# Altium PCB PCB.PcbDoc
Units mm, origin at the board's own origin, x right, y up, seen from the top; angles counter-clockwise.
Board outline 97 x 146.5 mm, 4 copper layers (Top Layer, Int1 (PWR), Int2 (GND), Bottom Layer), stack 1.586 mm thick; 101 components, 61 nets, 382 pads, 119 vias.
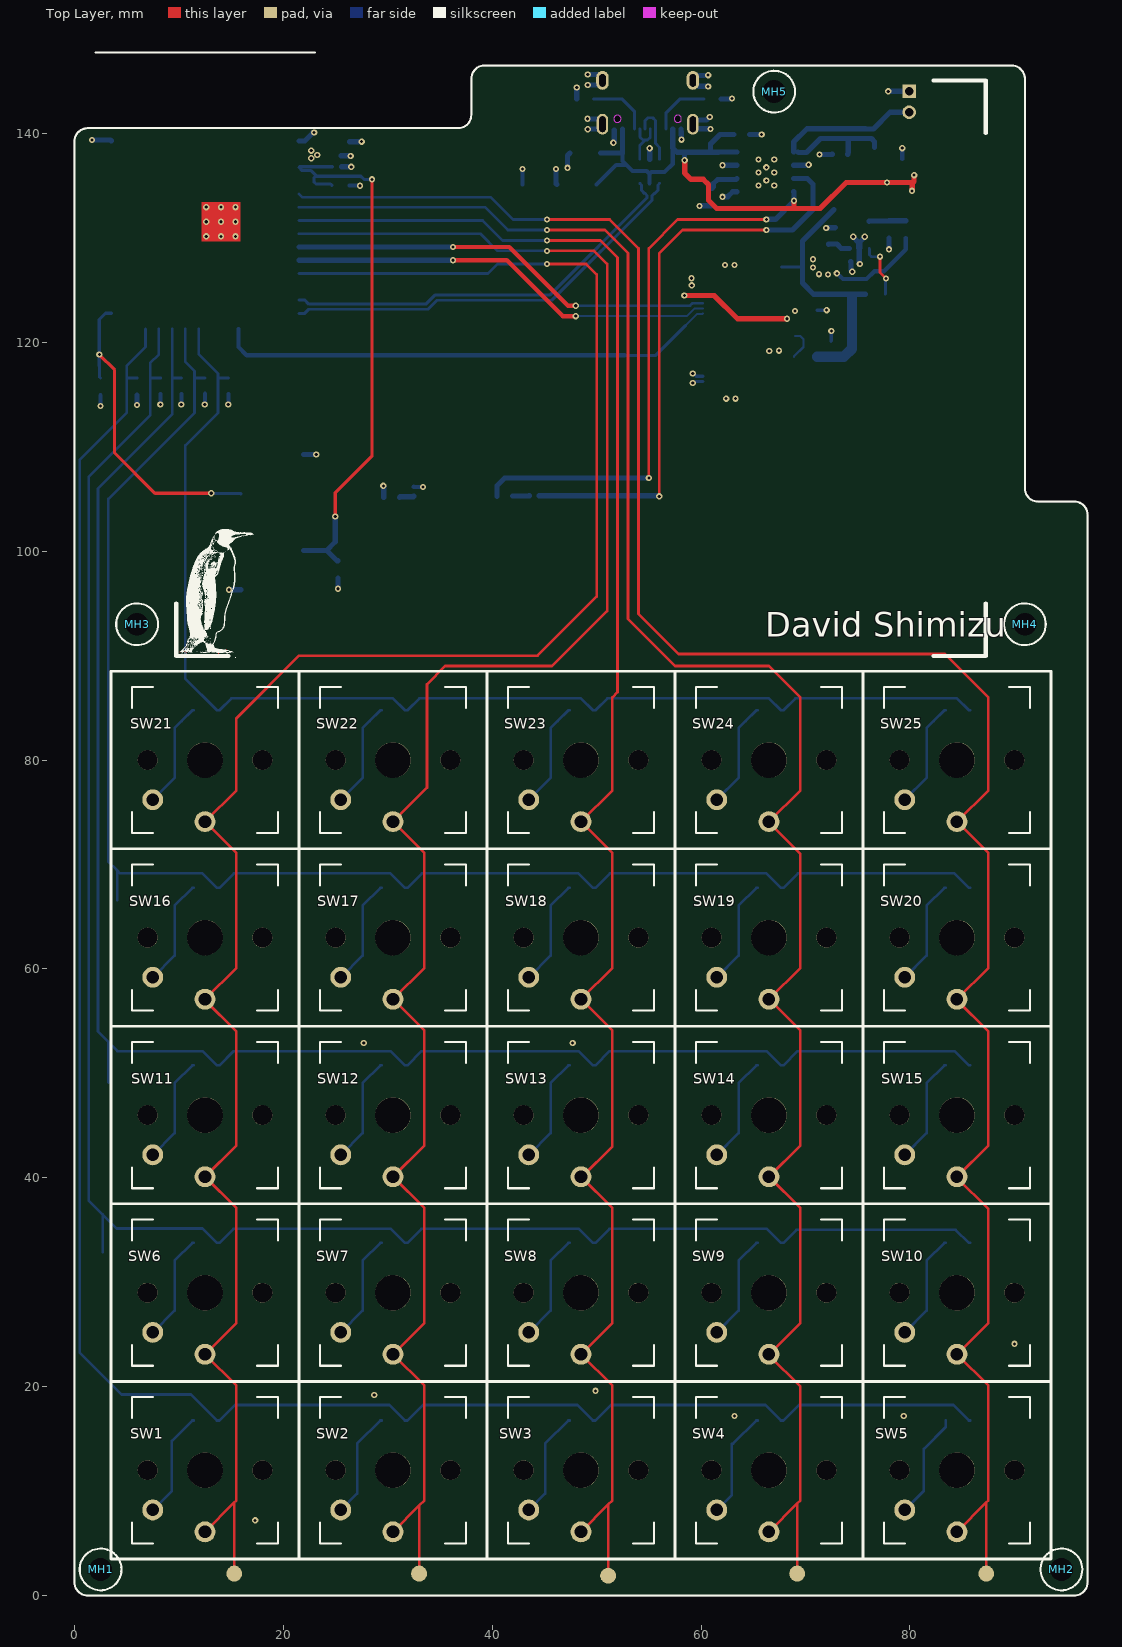
[diagram p0: Top Layer view]
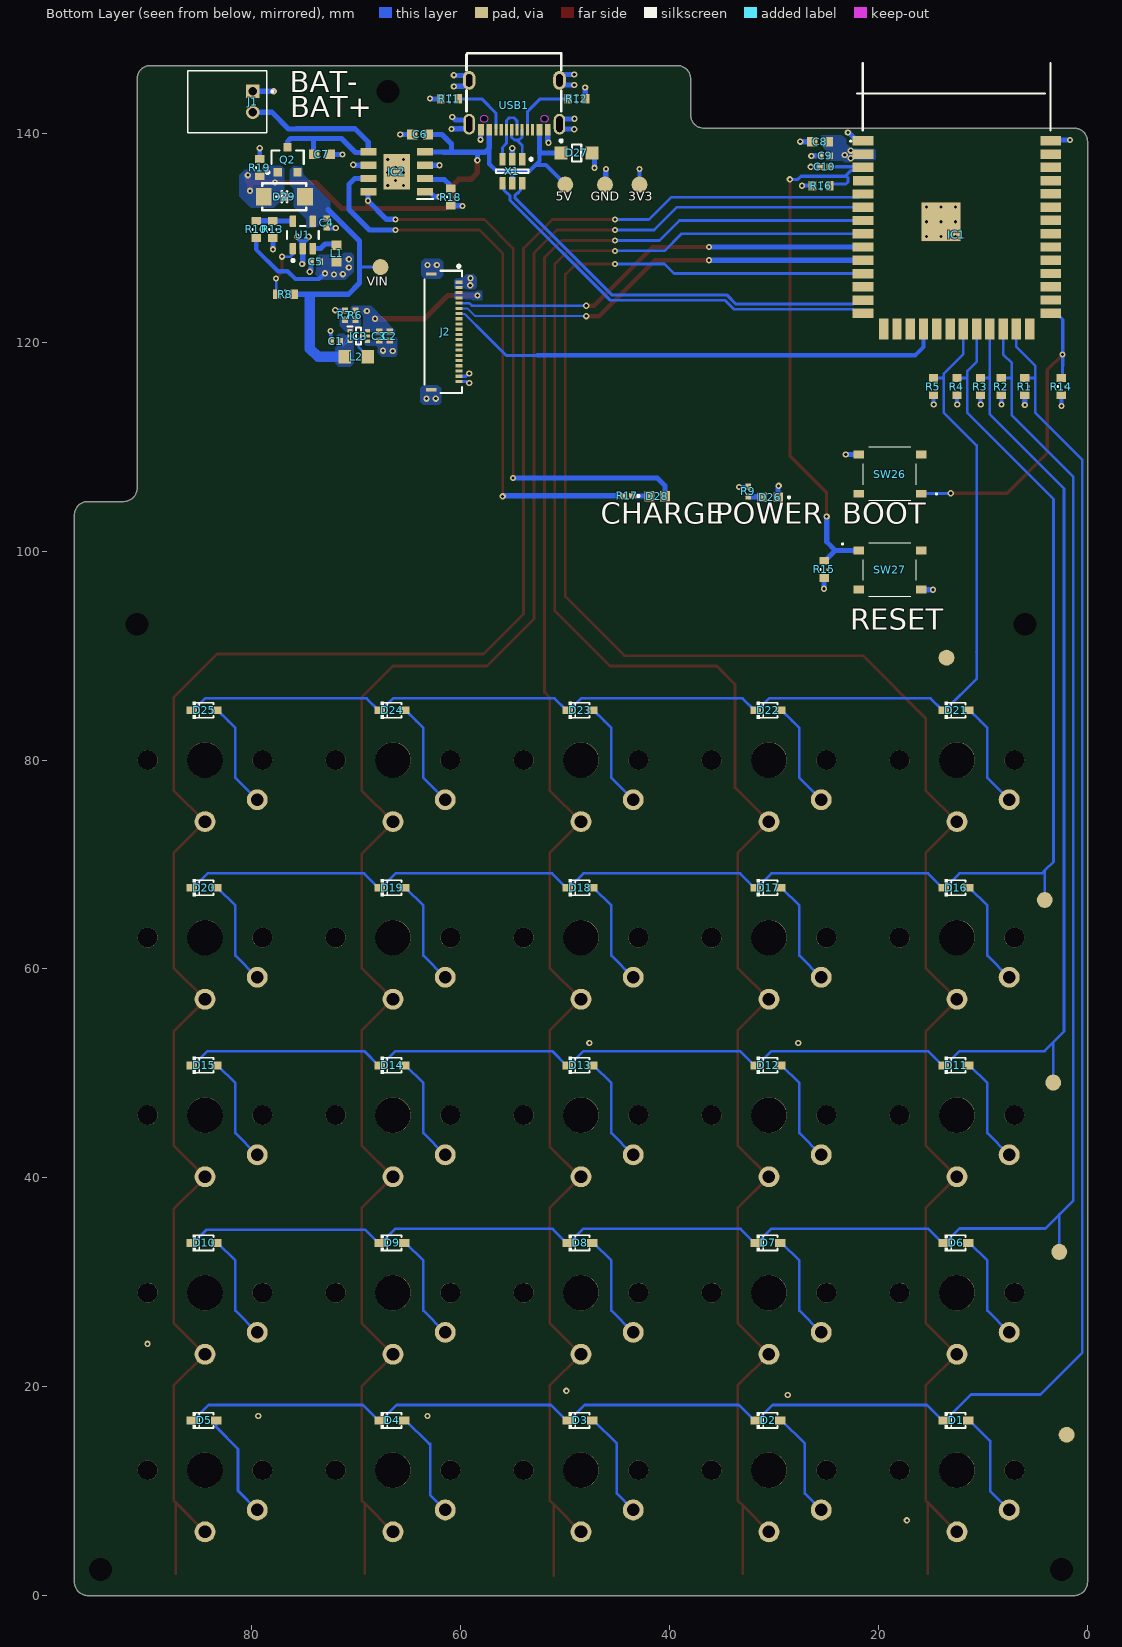
[diagram p1: Bottom Layer view, seen from below]
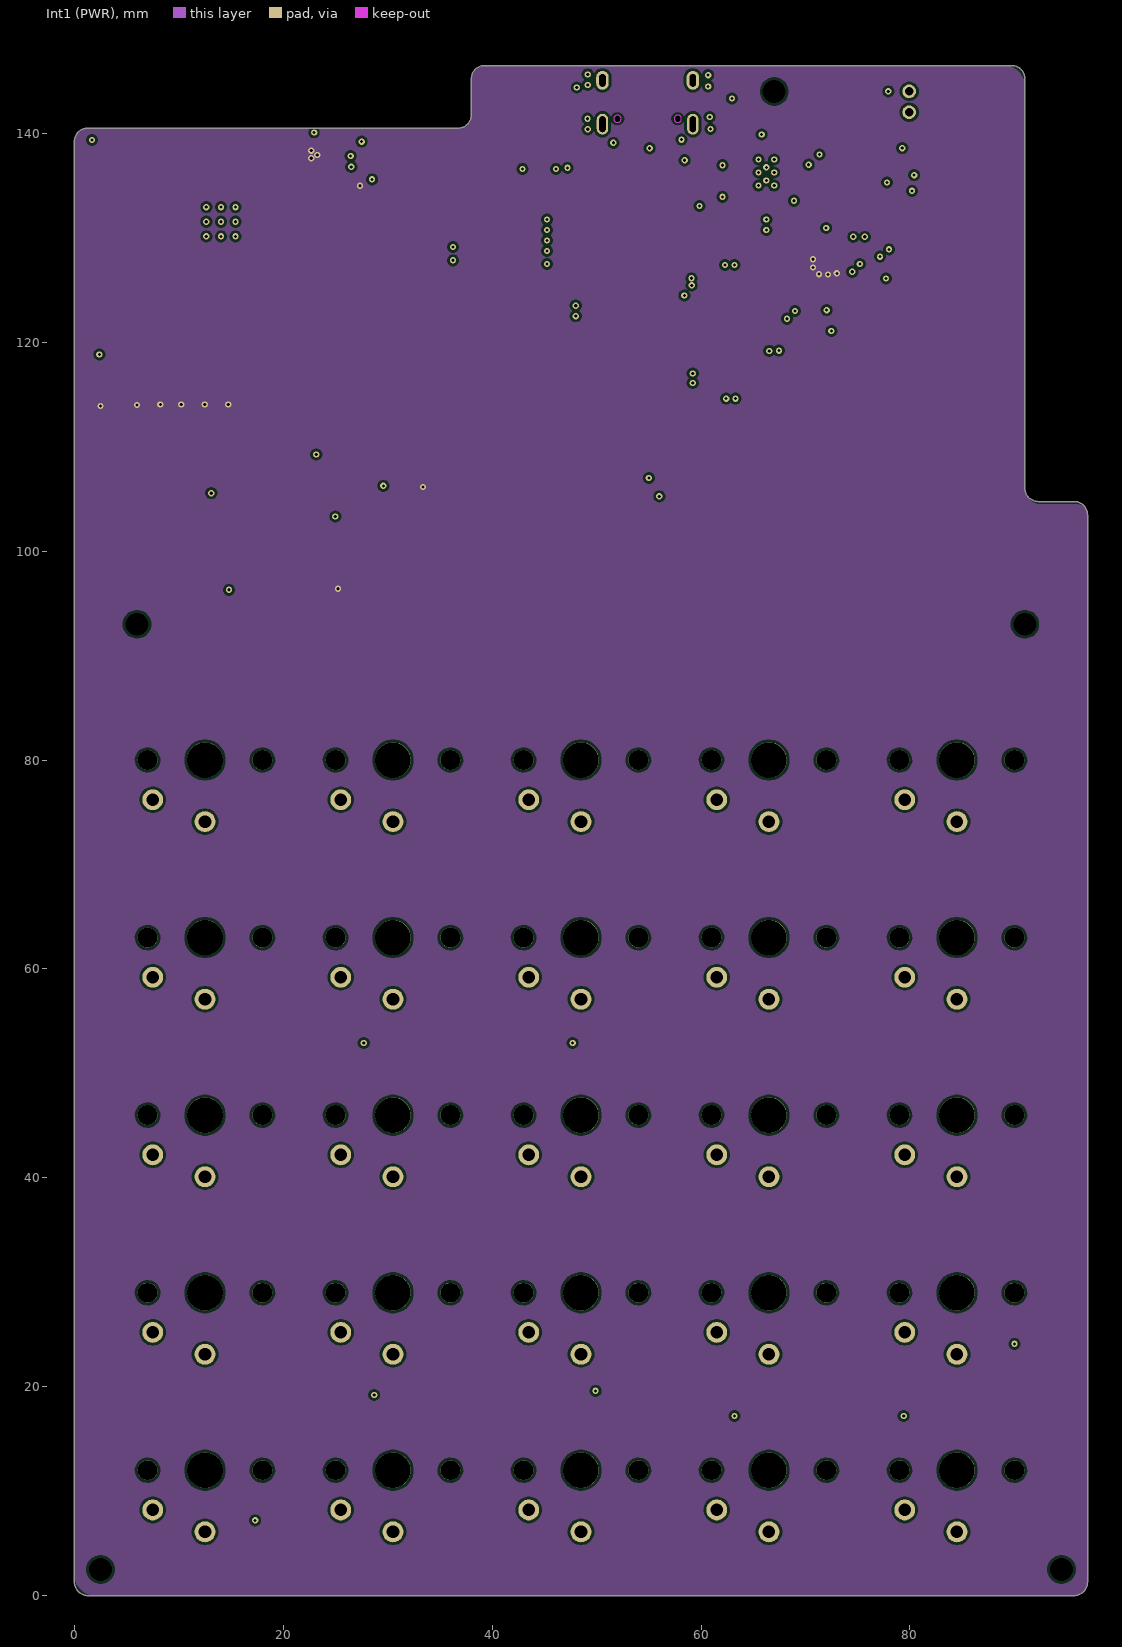
[diagram p2: Int1 (PWR)]
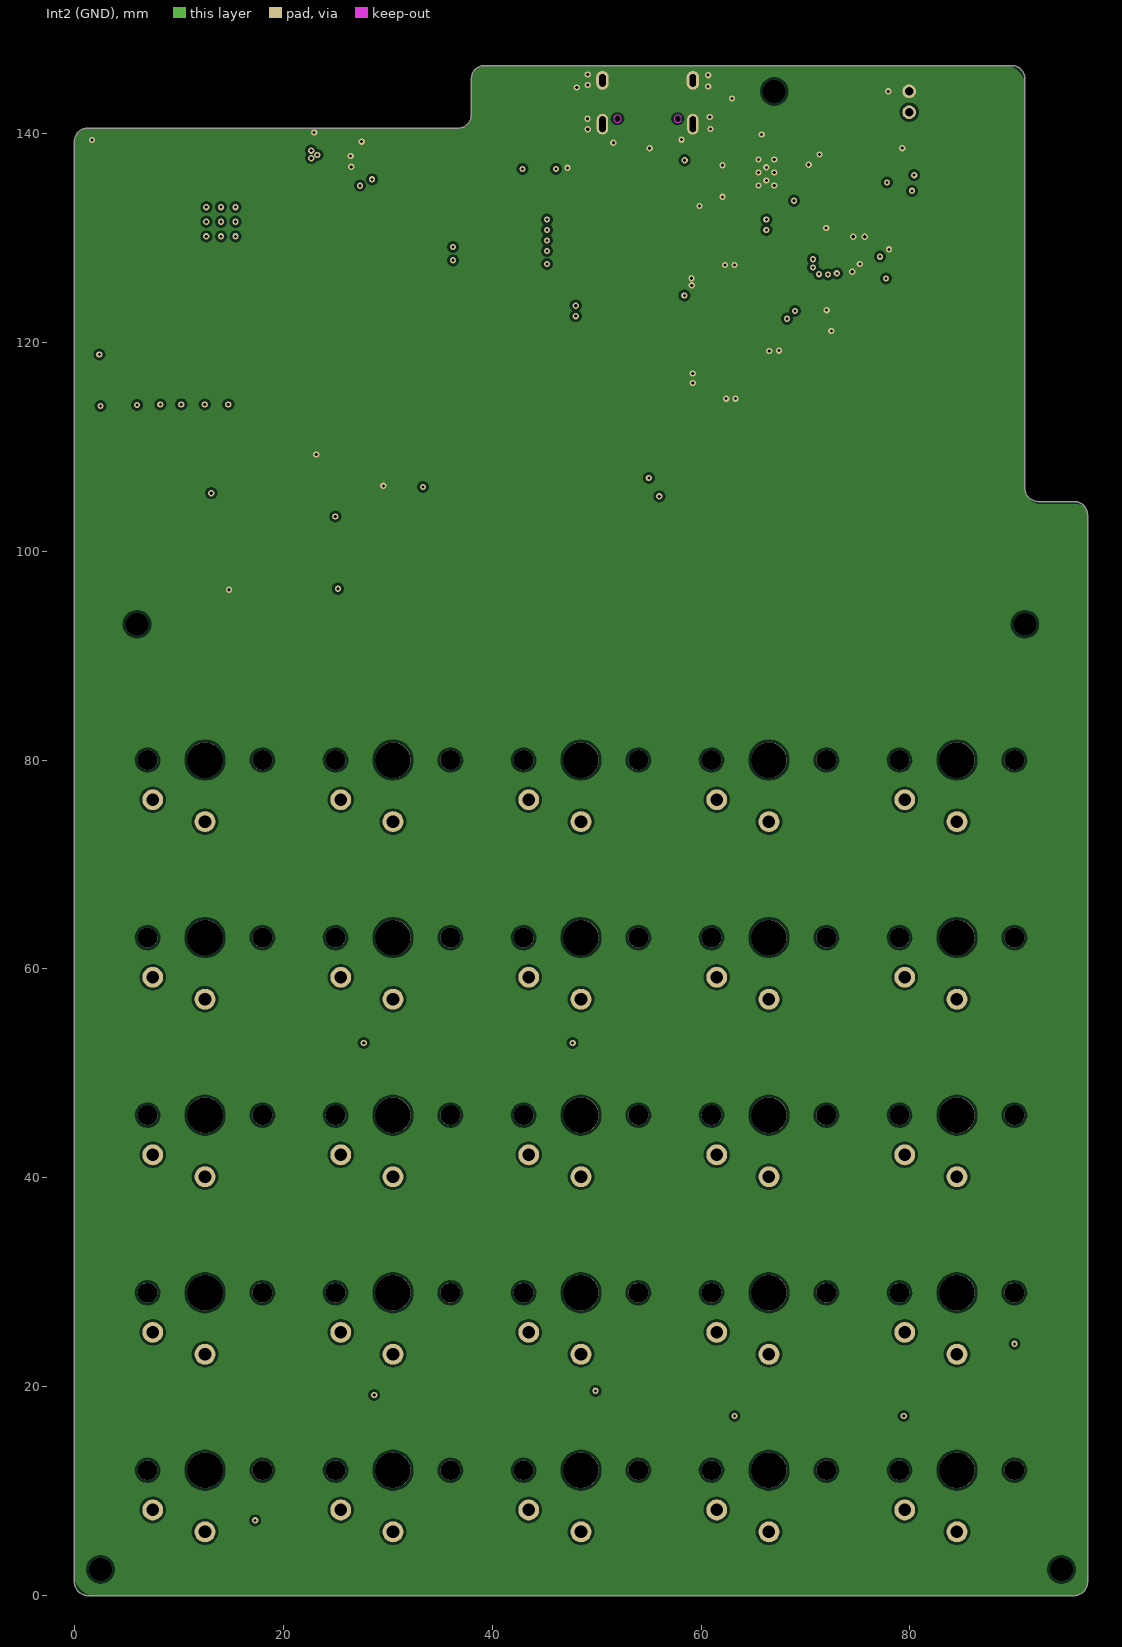
[diagram p3: Int2 (GND)]
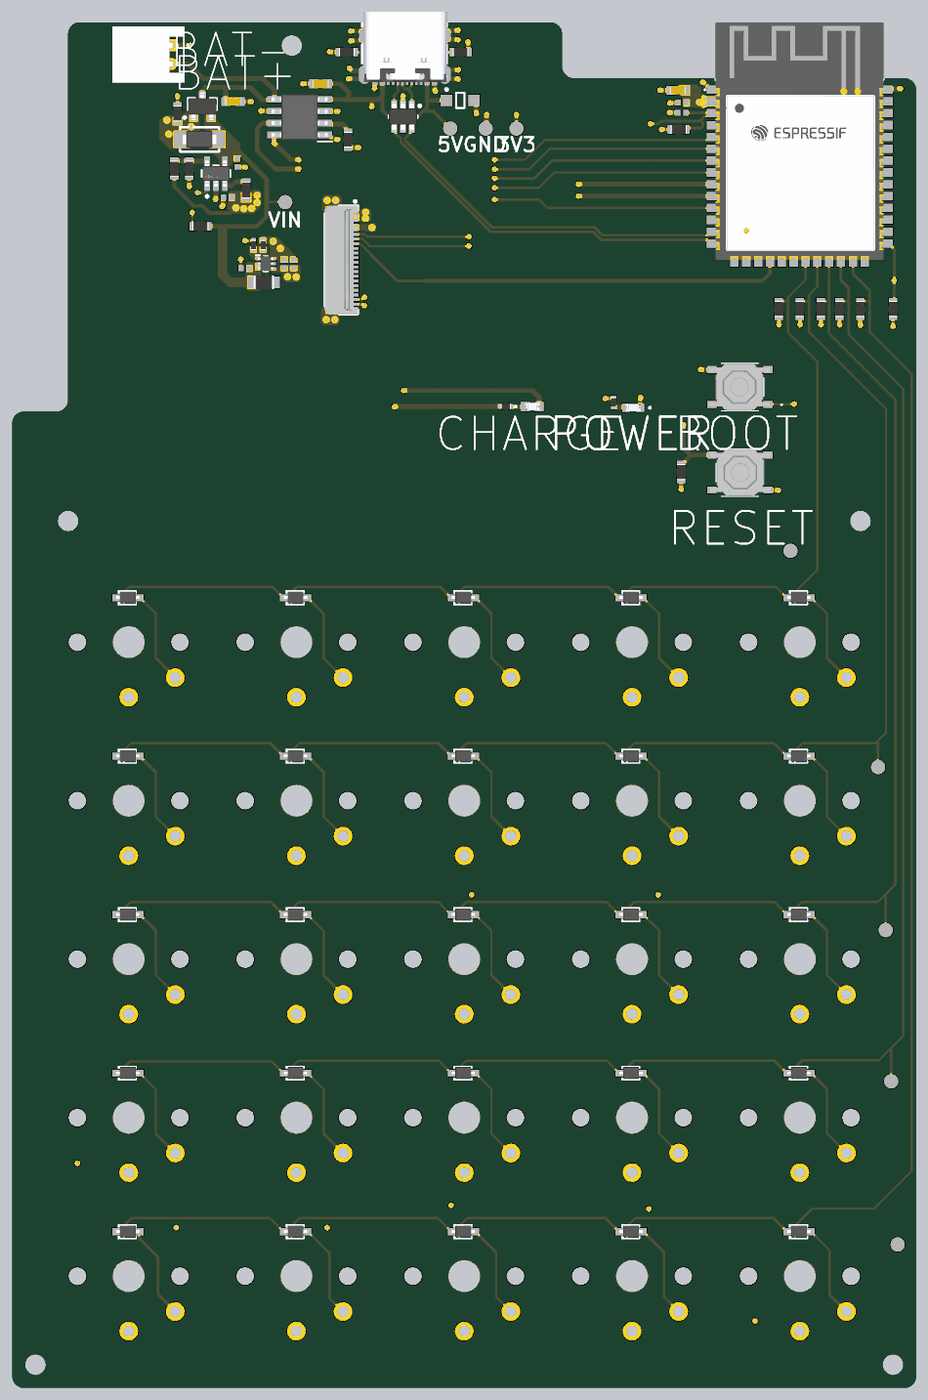
[diagram p4: 3D render of the assembled board from below, using the file's embedded part models]

## Layer stack, top to bottom
Top Solder: solder mask 0.0254, SM-001, Dk 4
Top Layer: signal copper 0.035
Dielectric 1: prepreg 0.2104, PP-017, Dk 4.4
Int1 (PWR): signal copper 0.0152
Dielectric 3: core 1.065, Core-039, Dk 4.6
Int2 (GND): signal copper 0.0152
Dielectric 5: prepreg 0.2104, PP-017, Dk 4.4
Bottom Layer: signal copper 0.035
Bottom Solder: solder mask 0.0254, SM-001, Dk 4

## Board outline
0,1.27 ccw(c1.27,1.27) 1.27,0 95.73,0 ccw(c95.73,1.27) 97,1.27 97,103.48 ccw(c95.73,103.48) 95.73,104.75 92.27,104.75 cw(c92.27,106.02) 91,106.02 91,145.23 ccw(c89.73,145.23) 89.73,146.5 39.27,146.5 ccw(c39.27,145.23) 38,145.23 38,141.77 cw(c36.73,141.77) 36.73,140.5 1.27,140.5 ccw(c1.27,139.23) 0,139.23

## Design rules (kind name [scope] priority, off if disabled: settings)
Clearance [All] p1: gap=0.254 ignorepadtopadclearanceinfootprint=FALSE
DiffPairsRouting [All] p1: maxlimit=0.254 minlimit=0.203 mostfreqgap=0.254 toplayer_maxgap=0.203 toplayer_prefgap=0.203 toplayer_minwidth=0.281 toplayer_maxwidth=0.281 toplayer_prefwidth=0.281 bottomlayer_maxgap=0.203 bottomlayer_prefgap=0.203 bottomlayer_minwidth=0.281 bottomlayer_maxwidth=0.281 bottomlayer_prefwidth=0.281 impedanceprofiledriven=TRUE impedanceprofileid={E9E0A380-49BF-4D5D-9670-F05BEB8BA2A6} impedanceprofilevalue=90.000000 maxuncoupledlength=12.7
PolygonConnect [All] p1: connectstyle=Direct reliefconductorwidth=0.254 reliefentries=4 polygonreliefangle="90 Angle" airgapwidth=0.254
RoutingVias [All] p1: holewidth=0.711 width=1.27 viastyle="Through Hole" minholewidth=0.711 minwidth=1.27 maxholewidth=0.711 maxwidth=1.27
SolderMaskExpansion [All] p1: expansion=0.102 istentingtop=FALSE
SupplyNets "Schematic Supply Nets_6" [InNet('5V LIPO')] p1: voltage=0.000
SupplyNets "Schematic Supply Nets_5" [InNet('GND')] p2: voltage=0.000
SupplyNets "Schematic Supply Nets_3" [InNet('BAT+')] p3: voltage=0.000
SupplyNets "Schematic Supply Nets_2" [InNet('5V')] p4: voltage=0.000
SupplyNets "Schematic Supply Nets_1" [InNet('+3V3')] p5: voltage=0.000
SupplyNets "Schematic Supply Nets" [InNet('VIN')] p6: voltage=0.000
Width [All] p1: maxlimit=2 minlimit=0.1 preferedwidth=0.254
29 further rules are at their usual default settings.

## Classes and differential pairs
component class PERIPHERALS: D1 D2 D3 D4 D5 D6 D7 D8 D9 D10 D11 D12 D13 D14 D15 D16 D17 D18 D19 D20 D21 D22 D23 D24 D25 J2 MH1 MH2 MH3 MH4 MH5 R1 R2 R3 R4 R5 SW1 SW2 SW3 SW4 SW5 SW6 SW7 SW8 SW9 SW10 SW11 SW12 SW13 SW14 SW15 SW16 SW17 SW18 SW19 SW20 SW21 SW22 SW23 SW24 SW25
differential pair USB: +USB_P -USB_N
differential pair USB_IN: +USB_IN_P -USB_IN_N

## Components (designator, comment, footprint, x,y, rotation, side; value= is the part's Value field where it differs from the comment)
C1 "10uF" "0402 capacitor" 72,120.1 r0 bottom
C2 "22uF" "0402 capacitor" 66.8,120.6 r90 bottom
C3 "22uF" "0402 capacitor" 67.8,120.6 r90 bottom
C4 "4u7" "0402 CAPACITOR" 72.85,131.425 r90 bottom
C5 "10uF" "0402 CAPACITOR" 73.9,127.7 r0 bottom
C6 "10uF" "0603 CAPACITOR" 63.9,139.9 r180 bottom
C7 "10uF" "0603 CAPACITOR" 73.3,138 r180 bottom
C8 "10uF" "0603 CAPACITOR" 25.6,139.2 r0 bottom
C9 "100nF" "0402 CAPACITOR" 25.1,137.863 r0 bottom
C10 "100nF" "0402 CAPACITOR" 25.15,136.8 r0 bottom
D1 "SOD-323" SOD-323 12.5,16.8 r180 bottom
D2 "SOD-323" SOD-323 30.5,16.8 r180 bottom
D3 "SOD-323" SOD-323 48.5,16.8 r180 bottom
D4 "SOD-323" SOD-323 66.5,16.8 r180 bottom
D5 "SOD-323" SOD-323 84.5,16.8 r180 bottom
D6 "SOD-323" SOD-323 12.5,33.8 r180 bottom
D7 "SOD-323" SOD-323 30.5,33.8 r180 bottom
D8 "SOD-323" SOD-323 48.5,33.8 r180 bottom
D9 "SOD-323" SOD-323 66.5,33.8 r180 bottom
D10 "SOD-323" SOD-323 84.5,33.8 r180 bottom
D11 "SOD-323" SOD-323 12.5,50.8 r180 bottom
D12 "SOD-323" SOD-323 30.5,50.8 r180 bottom
D13 "SOD-323" SOD-323 48.5,50.8 r180 bottom
D14 "SOD-323" SOD-323 66.5,50.8 r180 bottom
D15 "SOD-323" SOD-323 84.5,50.8 r180 bottom
D16 "SOD-323" SOD-323 12.5,67.8 r180 bottom
D17 "SOD-323" SOD-323 30.5,67.8 r180 bottom
D18 "SOD-323" SOD-323 48.5,67.8 r180 bottom
D19 "SOD-323" SOD-323 66.5,67.8 r180 bottom
D20 "SOD-323" SOD-323 84.5,67.8 r180 bottom
D21 "SOD-323" SOD-323 12.5,84.8 r180 bottom
D22 "SOD-323" SOD-323 30.5,84.8 r180 bottom
D23 "SOD-323" SOD-323 48.5,84.8 r180 bottom
D24 "SOD-323" SOD-323 66.5,84.8 r180 bottom
D25 "SOD-323" SOD-323 84.5,84.8 r180 bottom
D26 "RLED" LED_KT-0603R#1 30.375,105.15 r0 bottom
D27 "SMF5.0AT1G" ONSC-SOD-123FL-2-498_V 48.925,138.125 r180 bottom
D28 "RLED" LED_KT-0603R#2 41.2,105.275 r180 bottom
D29 "SS14" SMA(DO-214AC)(SCHOTTKY) 76.865,133.802 r0 bottom
IC1 "ESP32-S3-WROOM-1-N8R8" ESP32-S3-WROOM-1-N8R8 14.025,131.54 r180 bottom
IC2 "TP4056X" SOIC127P600X175-9N 66.15,136.325 r0 bottom
IC3 "TPS61023DRLR" SOTFL50P160X60-6N 69.8,120.6 r180 bottom
J1 "battery connector" "2PIN WIRE TO BOARD" 79.925,143.025 r270 bottom
J2 "503480-2000" MOLX-503480-2000 61.5,121 r270 bottom
L1 "2.2uH" "0603 INDUCTOR" 71.9,128.5 r270 bottom
L2 "1uH" "0802 inductor" 70,118.6 r180 bottom
MH1 "m2 mounting hole" "m2 mounting hole" 2.5,2.5 r180 top
MH2 "m2 mounting hole" "m2 mounting hole" 94.5,2.5 r180 top
MH3 "m2 mounting hole" "m2 mounting hole" 6,93 r180 top
MH4 "m2 mounting hole" "m2 mounting hole" 91,93 r180 top
MH5 "m2 mounting hole" "m2 mounting hole" 67,144 r180 top
Q2 "AO3401A" AO-SOT-23-3L_V 76.595,137.477 r90 bottom
R1 "4k7" "0603 RESISTOR" 6,115.75 r270 bottom
R2 "4k7" "0603 RESISTOR" 8.25,115.75 r270 bottom
R3 "4k7" "0603 RESISTOR" 10.25,115.75 r270 bottom
R4 "4k7" "0603 RESISTOR" 12.5,115.75 r270 bottom
R5 "4k7" "0603 RESISTOR" 14.75,115.75 r270 bottom
R6 "732K" "0402 resistor" 70.1,122.6 r90 bottom
R7 "100K" "0402 resistor" 71.1,122.6 r270 bottom
R8 "10K" "0603 RESISTOR" 76.8,124.6 r180 bottom
R9 "1K" "0402 RESISTOR" 32.481,105.715 r90 bottom
R10 "100K" "0603 RESISTOR" 79.6,130.8 r270 bottom
R11 "5K1" "0603 RESISTOR" 61.1,143.3 r180 bottom
R12 "5K1" "0603 RESISTOR" 48.9,143.3 r0 bottom
R13 "22K" "0603 RESISTOR" 78,130.8 r90 bottom
R14 "10K" "0603 RESISTOR" 2.5,115.75 r270 bottom
R15 "10K" "0603 RESISTOR" 25.225,98.25 r270 bottom
R16 "10K" "0603 RESISTOR" 25.5,135 r0 bottom
R17 "1K" "0402 RESISTOR" 44.05,105.3 r180 bottom
R18 "1k2" "0603 RESISTOR" 60.972,133.906 r90 bottom
R19 "10K" "0603 RESISTOR" 79.262,136.714 r270 bottom
SW1 "switch" CHOCV1 12.5,12 r0 top locked
SW2 "switch" CHOCV1 30.5,12 r0 top locked
SW3 "switch" CHOCV1 48.5,12 r0 top locked
SW4 "switch" CHOCV1 66.5,12 r0 top locked
SW5 "switch" CHOCV1 84.5,12 r0 top locked
SW6 "switch" CHOCV1 12.5,29 r0 top
SW7 "switch" CHOCV1 30.5,29 r0 top
SW8 "switch" CHOCV1 48.5,29 r0 top
SW9 "switch" CHOCV1 66.5,29 r0 top locked
SW10 "switch" CHOCV1 84.5,29 r0 top locked
SW11 "switch" CHOCV1 12.5,46 r0 top locked
SW12 "switch" CHOCV1 30.5,46 r0 top locked
SW13 "switch" CHOCV1 48.5,46 r0 top locked
SW14 "switch" CHOCV1 66.5,46 r0 top locked
SW15 "switch" CHOCV1 84.5,46 r0 top locked
SW16 "switch" CHOCV1 12.5,63 r0 top locked
SW17 "switch" CHOCV1 30.5,63 r0 top locked
SW18 "switch" CHOCV1 48.5,63 r0 top locked
SW19 "switch" CHOCV1 66.5,63 r0 top locked
SW20 "switch" CHOCV1 84.5,63 r0 top locked
SW21 "switch" CHOCV1 12.5,80 r0 top locked
SW22 "switch" CHOCV1 30.5,80 r0 top locked
SW23 "switch" CHOCV1 48.5,80 r0 top locked
SW24 "switch" CHOCV1 66.5,80 r0 top locked
SW25 "switch" CHOCV1 84.5,80 r0 top locked
SW26 "push button" "PUSH BUTTON" 18.6,107.4 r180 bottom
SW27 "push button" "PUSH BUTTON" 19.25,98.175 r0 bottom
U1 "TLV62569DBVR" FP-DBV0005A-MFG 75.135,130.273 r90 bottom
USB1 "usbc connector" "USBC CONNECTOR" 54.863,143.996 r0 bottom
X1 "USBLC6-2SC6" STM-SOT23-6L_V 55.075,136.375 r270 bottom

## Footprints (in the part's own frame and the unit in brackets; to place one, negate y for a bottom-side part, rotate by r counter-clockwise, add the part's x,y. Pads: shape width x height; smd on the part's side, far side on the other; paste and mask are expansions set on the pad)
"2PIN WIRE TO BOARD" [mm]
  rect 1.308x1.308 / inner round 1.308 / far side rect 1.308x1.308 hole 0.8: 1(-1,0)
  round 1.308 hole 0.8: 2(1,0)
  silkscreen extent -2.95,-6.25 2.95,2, body extent -2.95,-6.2 2.95,1.4, height 4.8
"0402 capacitor" [mm] "Chip Capacitor, 2-Leads, Body 1.00x0.50mm, IPC Medium Density"
  rect 0.56x0.62 smd: 1(-0.44,0) 2(0.44,0)
  body extent -0.53,-0.28 0.53,0.27, height 0.5
"0402 CAPACITOR" [mm] "Chip Capacitor, 2-Leads, Body 1.00x0.50mm, IPC Medium Density"
  rect 0.56x0.62 smd: 1(-0.44,0) 2(0.44,0)
  body extent -0.53,-0.28 0.53,0.27, height 0.5
"0402 resistor" [mm] "Chip Resistor, 2-Leads, Body 1.00x0.50mm, IPC Medium Density"
  rect 0.6x0.55 smd: 1(-0.45,0) 2(0.45,0)
  body extent -0.55,-0.28 0.55,0.28, height 0.4
"0402 RESISTOR" [mm] "Chip Resistor, 2-Leads, Body 1.00x0.50mm, IPC Medium Density"
  rect 0.6x0.55 smd: 1(-0.45,0) 2(0.45,0)
  body extent -0.55,-0.28 0.55,0.28, height 0.4
"0603 CAPACITOR" [mm] "Chip Capacitor, 2-Leads, Body 1.60x0.80mm, IPC Medium Density"
  rect 1x0.95 smd: 1(-0.75,0) 2(0.75,0)
  body extent -0.85,-0.45 0.85,0.45, height 0.9
"0603 INDUCTOR" [mm] "Chip Inductor, 2-Leads, Body 1.60x0.80mm, IPC Medium Density"
  rect 0.92x0.98 smd: 1(-0.79,0) 2(0.79,0)
  body extent -0.87,-0.48 0.87,0.48, height 0.95
"0603 RESISTOR" [mm] "Chip Resistor, 2-Leads, Body 1.60x0.80mm, IPC Medium Density"
  rect 0.75x0.9 smd: 1(-0.825,0) 2(0.825,0)
  silkscreen extent -0.05,-0.35 0.05,0.35, body extent -0.85,-0.45 0.85,0.45, height 0.55
"0802 inductor" [mm] "Chip Inductor, 2-Leads, Body 2.00x1.25mm, IPC Medium Density"
  rect 1.2x1.3 smd: 1(-1.1,0) 2(1.1,0)
  body extent -1.1,-0.72 1.1,0.72, height 0.95
AO-SOT-23-3L_V [mm] "SOT23, 3-Leads, Body 3.1x1.8mm, Pitch 0.95mm"
  rect 0.8x0.8 smd: 1(-1.2,0.95) 2(-1.2,-0.95) 3(1.2,0)
  silkscreen extent -1.32,-1.55 0.9,2.03, body extent -1.5,-1.55 1.5,1.55, height 1.25
CHOCV1 [mm]
  round 2 hole 1.2 paste-2539.97 mask+0.1: 1(-5,-3.8) 2(0,-5.9)
  round 1.9 hole 1.9 unplated paste-2539.97 mask+0.1: Un1(5.5,0) Un3(-5.5,0)
  round 3.4 hole 3.4 paste-2539.97 mask-3.4: Un2(0,0)
  silkscreen extent -9,-8.5 9,8.5
ESP32-S3-WROOM-1-N8R8 [mm]
  rect 2x0.9 smd: 1(-7.475,7.74) 2(-7.475,6.47) 3(-7.475,5.2) 4(-7.45,3.925) 5(-7.475,2.66) 6(-7.475,1.39) 7(-7.475,0.12) 8(-7.475,-1.15) 9(-7.475,-2.42) 10(-7.475,-3.69) 11(-7.475,-4.96) 12(-7.475,-6.23) 13(-7.475,-7.5) 14(-7.475,-8.77) 27(10.5,-8.765) 28(10.5,-7.495) 29(10.5,-6.225) 30(10.5,-4.955) 31(10.5,-3.685) 32(10.5,-2.415) 33(10.5,-1.145) 34(10.5,0.125) 35(10.5,1.395) 36(10.5,2.665) 37(10.5,3.935) 38(10.5,5.205) 39(10.5,6.475) 40(10.5,7.745)
  rect 0.9x2 smd: 15(-5.485,-10.275) 16(-4.215,-10.275) 17(-2.945,-10.275) 18(-1.675,-10.275) 19(-0.405,-10.275) 20(0.865,-10.275) 21(2.135,-10.275) 22(3.405,-10.275) 23(4.675,-10.275) 24(5.945,-10.275) 25(7.215,-10.275) 26(8.485,-10.275)
  rect 3.7x3.7 smd: 17(0,0)
  silkscreen extent -8.7,7.67 10.5,15.21, body extent -7.5,-10.54 10.5,14.96, height 3.1
FP-DBV0005A-MFG [mm]
  rrect17% 1.1x0.6 smd paste+0 mask+0: 1(-1.3,0.95) 2(-1.3,0) 3(-1.3,-0.95) 4(1.3,-0.95) 5(1.3,0.95)
  silkscreen extent -2.57,-1.53 0.87,1.53, body extent -1.4,-1.45 1.4,1.45, height 1.45
LED_KT-0603R#1 [mm]
  rect 0.9x0.9 smd: A(0.75,0) C(-0.75,0)
  silkscreen extent -1.9,-0.1 -1.7,0.1, body extent -0.8,-0.4 0.8,0.4, height 0.65
LED_KT-0603R#2 [mm]
  rect 0.95x1 smd: A(0.75,0) C(-0.75,0)
  silkscreen extent -1.9,-0.1 -1.7,0.1, body extent -0.8,-0.4 0.8,0.4, height 0.65
"m2 mounting hole" [mm]
  round 0 hole 2.2 unplated mask+0.102: MH(0,0)
  silkscreen extent -2,-2 2,2
MOLX-503480-2000 [mm] "FPC Connector, 20-Leads, Right Angle, Pitch 0.5 mm, Mated Height 1.0 mm, SMT"
  rect 0.3x0.7 smd: 1(-4.75,1.325) 2(-4.25,1.325) 3(-3.75,1.325) 4(-3.25,1.325) 5(-2.75,1.325) 6(-2.25,1.325) 7(-1.75,1.325) 8(-1.25,1.325) 9(-0.75,1.325) 10(-0.25,1.325) 11(0.25,1.325) 12(0.75,1.325) 13(1.25,1.325) 14(1.75,1.325) 15(2.25,1.325) 16(2.75,1.325) 17(3.25,1.325) 18(3.75,1.325) 19(4.25,1.325) 20(4.75,1.325)
  rect 0.3x1 smd: MP1(-5.54,-1.325) MP2(5.54,-1.325)
  silkscreen extent -6.4,-1.98 5.85,1.63, body extent -5.85,-1.97 5.85,1.63, height 1.91
ONSC-SOD-123FL-2-498_V [mm] "SOD, 2-Leads, Body 2.7x1.65mm"
  rect 1.25x1.22 smd: 1(-1.475,0) 2(1.475,0)
  silkscreen extent -1.6,-0.82 0.45,1.28, body extent -1.35,-0.82 1.35,0.82, height 0.98
"PUSH BUTTON" [mm]
  rect 1x0.75 smd: A1(2.675,-1.9) B1(-3.325,-1.9) C1(2.675,1.85) D1(-3.325,1.85)
  silkscreen extent -2.87,-2.58 4.18,2.52, body extent -3.62,-2.58 2.88,2.52, height 1.5
SMA(DO-214AC)(SCHOTTKY) [mm] "ss14"
  rect 1.52x1.68 smd: 1(-1.926,-0.134) 2(2.004,-0.134)
  silkscreen extent -2.06,-1.43 2.14,1.17, body extent -1.75,-1.04 1.85,0.76, height 1.44
SOD-323 [mm] "1N4148WS"
  rect 1x0.75 smd: 1(-1.261,-0.034) 2(1.084,-0.034)
  silkscreen extent -1.17,-0.84 0.81,0.77, body extent -1.35,-0.63 1.15,0.63, height 0.91
SOIC127P600X175-9N [mm]
  rect 1.525x0.7 smd: 1(-2.712,1.905) 2(-2.712,0.635) 3(-2.712,-0.635) 4(-2.712,-1.905) 5(2.712,-1.905) 6(2.712,-0.635) 7(2.712,0.635) 8(2.712,1.905)
  rect 2.513x3.402 smd: 9(0,0)
  silkscreen extent -3.47,2.61 -1.95,2.61, body extent -3,-2.45 3,2.45, height 1.75
SOTFL50P160X60-6N [mm]
  rect 0.475x0.3 smd: 1(-0.838,0.5) 2(-0.838,0) 3(-0.838,-0.5) 4(0.838,-0.5) 5(0.838,0) 6(0.838,0.5)
  silkscreen extent -1.07,-0.8 0.25,0.9, body extent -0.8,-0.78 0.8,0.82, height 0.6
STM-SOT23-6L_V [mm] "SOT23, 6-Leads, Body 3.05x1.75mm, Pitch 0.95mm"
  rect 1.2x0.6 smd: 1(-1.15,0.95) 2(-1.15,0) 3(-1.15,-0.95) 4(1.15,-0.95) 5(1.15,0) 6(1.15,0.95)
  silkscreen extent -1.27,-1.55 0.15,1.92, body extent -1.6,-1.53 1.6,1.53, height 1.45
"USBC CONNECTOR" [mm]
  rect 0.55x1.1 smd paste-100 mask+0.05: 1(-3.18,3.667) 2(-2.38,3.667) 11(2.421,3.667) 12(3.22,3.667)
  rect 0.3x1.1 smd paste-100 mask+0.05: 3(-1.73,3.667) 4(-1.229,3.667) 5(-0.73,3.667) 6(-0.23,3.667) 7(0.27,3.667) 8(0.77,3.667) 9(1.27,3.667) 10(1.771,3.667)
  oval 1.2x1.8 hole 0.6 slot 1.2 at 90 deg paste-2539.97 mask+0.05: 13(-4.305,-1.083) 14(4.345,-1.083)
  oval 1.1x2 hole 0.6 slot 1.5 at 90 deg paste-2539.97 mask+0.05: 13(-4.305,3.117) 14(4.345,3.117)
  Keep-Out Layer board cut-out: -2.52,2.597 -2.554,2.446 -2.651,2.324 -2.792,2.256 -2.947,2.256 -3.088,2.324 -3.185,2.446 -3.22,2.597 -3.22,2.597 -3.185,2.749 -3.088,2.871 -2.947,2.939 -2.792,2.939 -2.651,2.871 -2.554,2.749 -2.52,2.597
  Keep-Out Layer board cut-out: 3.26,2.597 3.226,2.446 3.129,2.324 2.988,2.256 2.833,2.256 2.692,2.324 2.595,2.446 2.56,2.597 2.56,2.597 2.595,2.749 2.692,2.871 2.833,2.939 2.988,2.939 3.129,2.871 3.226,2.749 3.26,2.597
  Keep-Out Layer circle w0.025: c-2.87,2.597 r0.35
  Keep-Out Layer circle w0.025: c2.91,2.597 r0.35
  Keep-Out Layer region: -2.52,2.597 -2.554,2.446 -2.651,2.324 -2.792,2.256 -2.947,2.256 -3.088,2.324 -3.185,2.446 -3.22,2.597 -3.22,2.597 -3.185,2.749 -3.088,2.871 -2.947,2.939 -2.792,2.939 -2.651,2.871 -2.554,2.749 -2.52,2.597
  Keep-Out Layer region: 3.26,2.597 3.226,2.446 3.129,2.324 2.988,2.256 2.833,2.256 2.692,2.324 2.595,2.446 2.56,2.597 2.56,2.597 2.595,2.749 2.692,2.871 2.833,2.939 2.988,2.939 3.129,2.871 3.226,2.749 3.26,2.597
  silkscreen extent -4.48,-3.68 4.59,1.89, body extent -4.5,-3.65 4.44,4.16, height 3.21

## Part data
C1 C2 C3 C4 C5 C9 C10: library part "0402 capacitor", "0402 smd capacitor"
C6 C7 C8: library part "0603 capacitor"
D1 D2 D3 D4 D5 D6 D7 D8 D9 D10 D11 D12 D13 D14 D15 D16 D17 D18 D19 D20 D21 D22 D23 D24 D25: "1N4148WS"
D26 D28: library part KT-0603R, "Red 0603 Light Emitting Diodes", Package=Package, Check_prices=https://www.snapeda.com/parts/KT-0603R/Hubei+KENTO+Elec/view-part/?ref=eda, MF="Hubei KENTO Elec", MP=KT-0603R, SnapEDA_Link=https://www.snapeda.com/parts/KT-0603R/Hubei+KENTO+Elec/view-part/?ref=snap
D27: library part CMP-1061-00612-1, "200 W Transient Voltage Suppressor, 2-Pin SOD-123FL, Pb-Free, Tape and Reel", Manufacturer="On Semiconductor", ComponentLink1Description="Manufacturer URL", ComponentLink1URL=http://www.onsemi.com/, ComponentLink2Description=Datasheet, ComponentLink2URL=http://www.onsemi.com/pub_link/Collateral/SMF5.0AT1-D.PDF, ComponentLink3Description="Package Specification", ComponentLink3URL=http://www.onsemi.com/pub_link/Collateral/498-01.PDF, DatasheetVersion="Rev. 7", Direction=Unidirectional, IR Max (uA)=400, Mounting Technology="Surface Mount", PackageDescription="2-Pin SOD, Body 1.65 x 2.7 mm", PackageReference=SOD-123FL-2-498, PackageVersion="Rev. D, 05/2013", Packing="Tape and Reel", PartNumber=SMF5.0AT1G, RoHS=Pb-Free, V(BR) Typ (V)=6.7
D29: library part ss14, "40V Independent Type 1A 550mV@1A SMA(DO-214AC) Schottky Diodes ROHS"
IC2: "Integrated Circuit", Manufacturer_Name="Nanjing Extension Microelectronics", Datasheet Link=https://datasheet.lcsc.com/szlcsc/Nanjing-Extension-Microelectronics-TP4056X_C191323.pdf, Height=1.75mm, Manufacturer_Part_Number=TP4056X
IC3: "Integrated Circuit", Manufacturer_Name="Texas Instruments", Mouser Part Number=595-TPS61023DRLR, Arrow Part Number=TPS61023DRLR, Arrow Price/Stock=https://www.arrow.com/en/products/tps61023drlr/texas-instruments?utm_currency=USD&region=nac, Datasheet Link=http://www.ti.com/lit/ds/symlink/tps61023.pdf, Height=0.6mm, Manufacturer_Part_Number=TPS61023DRLR, Mouser Price/Stock=https://www.mouser.co.uk/ProductDetail/Texas-Instruments/TPS61023DRLR?qs=BJlw7L4Cy7%2FfEnwYuWeGOg%3D%3D
J1: library part "2pin wire to board"
J2: library part CMP-1241-00121-1, "0.5 mm Pitch Easy-On(TM) BackFlip(TM) Type FPC Connector, 1.0 mm Mated Height, Right Angle, SMT, Dual Contact, 20 Circuits, -40 to 85 degC, ELV and RoHS Compliant, Tape and Reel", Current (Max per Contact)=0.5A, Manufacturer=Molex, Voltage (Max)="50V AC (RMS)/DC", Circuits (Loaded)=20, ComponentLink1Description="Manufacturer URL", ComponentLink1URL=http://www.molex.com/molex/index.jsp, ComponentLink2Description=Datasheet, ComponentLink2URL=http://www.molex.com/webdocs/datasheets/pdf/en-us/5034802000_FFC_FPC_CONNECTORS.pdf, ComponentLink3Description="Package Specification", ComponentLink3URL=http://www.molex.com/pdm_docs/sd/5034802000_sd.pdf, Contact Position=Dual, Durability (mating cycles max)=10, Entry Angle="90degrees Angle", Mated Height=1.00mm, Material - Metal="Phosphor Bronze", Material - Plating Mating=Gold, Material - Plating Termination="Gold, Tin", Mounting Technology="Surface Mount", Number of Rows=1, Orientation="Right Angle", PackageDescription="20-Lead FPC Connector, Pitch 0.5 mm", PackageReference=503480-2000, PackageVersion="Rev. F, 09/2012", Packing="Tape and Reel", PartNumber=503480-2000, PCB Locator=No, PCB Retention=Yes, Pitch - Mating Interface=0.50mm, Polarized to PCB=Yes, RoHS=TRUE, Stackable=No
L1: library part "0603 inductor"
L2: library part "0805 inductor"
Q2: library part CMP-2000-05778-1, "P-Channel MOSFET, 30 V, 4 A, -55 to 150 degC, 3-Pin SOT-23-3L, RoHS, Tape and Reel", Continuous Drain Current=4A, Drain-Source On-Volt=30V, Frequency (Max)=NotRequiredMHz, Gate-Source Voltage (Max)=?12V, Manufacturer="Alpha and Omega", Operating Temp Range=-55Cto150C, Operating Temperature Classification=Military, Output Power (Max)=NotRequiredW, Package Description="3-Pin Small Outline Transistor, Body 2.95 x 1.6 mm, Pitch 0.95 mm", Package Reference=SOT-23-3L, Package Type=SOT-23, Power Dissipation=1.4W, Power Gain=NotRequireddB, Channel Mode=Enhancement, Datasheet URL=http://www.aosmd.com/res/data_sheets/AO3401A.pdf, Datasheet Version="Rev. 3, 03/2011", Drain Current (Max)=4A, Drain Efficiency=NotRequired%, Drain-Source On-Res=0.044ohm, Manufacturer URL=http://www.aosmd.com/, Mounting=SurfaceMount, Mounting Technology=SurfaceMount, Noise Figure=NotRequireddB, Number of  Elements=1, Package URL=http://www.aosmd.com/res/packaging_information/SOT-23-3L.pdf, Pin Count=3, Polarity=P, Rad Hardened=No, Type=PowerMOSFET
R1 R2 R3 R4 R5 R8 R10 R11 R12 R13 R14 R15 R16 R18 R19: library part "0603 resistor"
R6 R7 R9 R17: library part "0402 resistor"
U1: library part CMP-04918-000387-1, "IC REG BUCK ADJ 2A SOT23-5", Case/Package=SOT-23-5, Max Input Voltage=5.5V, Max Operating Temperature=125°C, Min Input Voltage=2.5V, Min Operating Temperature=-40°C, Min Output Voltage=600mV, Output Current=2A, Switching Frequency=1.5MHz, Max Output Voltage=5.5V, Mount="Surface Mount", Output Configuration=Positive, Output Type=Adjustable, Packaging="Cut Tape", RoHS Compliant=Yes, Synchronous Rectifier=Yes

## Free pads (board coordinates)
  round 1.524 smd far side: 2(46.2,135.1) 3(42.9,135.1) 4(50,135.1) 6(3.284,49.116) 7(2.7,32.9) 8(2,15.4) 9(4.1,66.6) 10(13.5,89.8) 16(67.7,127.2)
  round 1.524 smd: 11(15.3,2.1) 12(33,2.1) 13(51.1,1.9) 14(69.2,2.1) 15(87.3,2.1)

## Via types
v1: diameter 0.6, hole 0.3, Top Layer to Bottom Layer, 111 vias
v2: diameter 0.6, hole 0.3, Top Layer to Bottom Layer, tented bottom, 8 vias

## Nets (pads, with @x,y where several pads share a name; then routed paths per layer and width w, separated by ;. In a path a pad name is that pad's centre, name@x,y a point inside that pad or via, vN(x,y) a via of type N, cw(c..) or ccw(c..) an arc to the next point about the centre after c; other vN are vias at no path point)
5V: C6.2 D27.1 D28.A D29.2 IC2.4 IC2.8 Q2.1 R19.2 USB1.2 USB1.11 X1.5 | length 112.5
  Top Layer w0.254: v1(55,107) 55,129 57.75,131.75 v1(66.25,131.75)
  Top Layer w0.5: v1(58.425,137.425) 58.425,136.212 59.037,135.6 60.2,135.6 60.7,135.1 60.7,133.6 61.5,132.8 68.9,132.8 ; v1(68.9,133.55) 68.9,132.8 ; v1(80.2,134.5) 80.219,134.519 80.219,135.219 80.3,135.3 ; v1(80.4,136) 80.381,135.981 80.381,135.381 80.3,135.3 ; 68.9,132.8 71.4,132.8 73.9,135.3 v1(77.8,135.3) 80.3,135.3
  Bottom Layer w0.4: 50,135.1 51.869,136.969 52.869,136.969 ; 52.483,138.083 52.475,138.075 52.475,137.362 52.869,136.969 ; X1.5 55.075,136.125 ; 57.284,138.616 57.284,137.084 56.5,136.3 55.25,136.3 55.075,136.125 ; 52.869,136.969 53.437,136.4 54.8,136.4 55.075,136.125
  Bottom Layer w0.5: D28.A@40.465,105.235 40.465,106.265 41.2,107 v1(55,107) ; D27.1 52.425,138.125 ; 52.483,138.083 USB1.2 USB1.2@52.483,140.429 ; USB1.11@57.284,140.429 USB1.11 57.284,138.616 57.7,138.2 58.4,138.2 ; v1(58.425,137.425) 58.406,137.444 58.406,138.194 58.4,138.2 ; C6.2 61.8,139.9 60.9,139 60.9,138.2 ; IC2.4 63.423,138.215 61.665,138.215 61.65,138.2 60.9,138.2 ; v1(66.25,131.75) 66.269,131.769 67.119,131.769 v1(68.9,133.55) 68.9,134.382 IC2.8 ; 58.4,138.2 60.9,138.2
"5V LIPO": C2.2 C3.2 IC3.6 J2.3 J2.4 R6.2 | length 10.7
  Top Layer w0.5: v1(58.4,124.475) 61.25,124.475 63.475,122.25 v1(68.225,122.25)
  other v1: 69,123
+3V3: C5.1 C8.1 C9.1 IC1.2 L1.2 R1.2 R2.2 R3.2 R4.2 R5.2 R9.2 R10.2 R14.2 R15.2 R16.2 | length 17.7
  Bottom Layer w0.4: v1(2.5,113.9) R14.2 ; v1(8.225,114.05) 8.238,114.062 R2.2@8.238,115.063 ; v1(10.225,114.051) 10.237,114.064 10.237,115.042 R3.2@10.25,115.055 ; v1(12.475,114.05) 12.488,114.062 12.488,115.063 R4.2@12.5,115.075 ; v1(14.725,114.05) 14.738,114.062 R5.2@14.738,115.063 ; R16.2 26.33,134.995 27.339,134.995 v1(27.343,134.991) ; R9.2 32.488,106.158 33.367,106.158 v1(33.375,106.15) ; 73.3,126.325 73.575,126.05 75.85,126.05 76.6,126.8 77.5,126.8 79.6,128.9 R10.2
  Bottom Layer w0.5: v1(6,114) R1.2 ; v1(25.225,96.4) R15.2
  other v1: 72.15,126.5 71.3,126.525 73,126.6 70.725,127.15 70.725,127.95 22.675,137.625 23.25,137.925 22.675,138.35
BAT+: C7.1 IC2.5 J1.2 Q2.3 | length 23.3
  Bottom Layer w0.5: IC2.5 68.862,139.162 70.15,140.45 75.75,140.45 75.775,140.425 76.5,140.425 78.1,142.025 J1.2 ; IC2.5@69.274,138.227 69.34,138.162 70.105,138.162 71.442,139.5 74.1,139.5 ; C7.1 74.1,138.225 74.1,139.5 ; Q2.3 76.6,138.682 76.6,139.207 76.307,139.5 74.1,139.5
CC1: R12.2 USB1.4 | length 6.1
  Bottom Layer w0.3: R12.2 52.4,143.3 53.634,142.066 USB1.4@53.634,140.429
CC2: R11.2 USB1.10 | length 5.7
  Bottom Layer w0.3: USB1.10@56.634,140.429 56.634,141.934 58,143.3 R11.2
COL_1: IC1.11 SW1.2 SW6.2 SW11.2 SW16.2 SW21.2 | length 195.3
  Top Layer w0.254: SW1.2 15.25,8.85 ; 15.3,2.1 15.3,8.8 15.25,8.85 ; v1(45.25,127.5) 49,127.5 50,126.5 50,95.662 44.338,90 21.5,90 15.5,84 15.5,77.1 SW21.2 15.5,71.1 15.5,60.1 SW16.2 12.5,57 15.5,54 15.5,43.1 SW11.2 15.5,37.1 15.5,26.1 SW6.2 15.5,20.1 15.5,9.1 15.25,8.85
  Bottom Layer w0.254: IC1.11 39.58,126.58 40.5,127.5 v1(45.25,127.5)
COL_2: IC1.8 SW2.2 SW7.2 SW12.2 SW17.2 SW22.2 | length 183
  Top Layer w0.254: SW2.2 33,8.6 ; 33,2.1 33,8.6 ; v1(45.25,128.75) 49.75,128.75 51,127.5 51,94.275 45.725,89 35.5,89 33.75,87.25 33.75,77.35 SW22.2 33.5,71.1 33.5,60.1 SW17.2 33.5,54.1 33.5,43.1 SW12.2 33.5,37.1 33.5,26.1 SW7.2 33.5,20.1 33.5,9.1 33,8.6
  Bottom Layer w0.254: IC1.8 38.86,130.39 40.5,128.75 v1(45.25,128.75)
COL_3: IC1.7 SW3.2 SW8.2 SW13.2 SW18.2 SW23.2 | length 172.2
  Top Layer w0.254: v1(45.25,129.75) 50.351,129.75 52,128.101 52,86.5 51.5,86 51.5,77.1 SW23.2 51.5,71.1 51.5,60.1 SW18.2 51.5,54.1 51.5,43 48.6,40.1 SW13.2 51.5,37.1 51.5,26.1 SW8.2 51.5,20.1 51.5,9.1 51.1,8.7 ; SW3.2 51.1,8.7 ; 51.1,1.9 51.1,8.7
  Bottom Layer w0.254: IC1.7 39.09,131.66 41,129.75 v1(45.25,129.75)
COL_4: IC1.6 SW4.2 SW9.2 SW14.2 SW19.2 SW24.2 | length 185.7
  Top Layer w0.254: v1(45.25,130.75) 50.779,130.75 53,128.529 53,93.5 57.5,89 66.5,89 69.5,86 69.5,77.1 SW24.2 66.5,74 69.5,71 69.5,60.1 SW19.2 69.5,54.1 69.5,43.1 SW14.2 69.5,37.1 69.5,26.1 SW9.2 66.5,23 69.5,20 69.5,9.1 69.2,8.8 ; SW4.2 69.2,8.8 ; 69.2,2.1 69.2,8.8
  Bottom Layer w0.254: IC1.6 39.32,132.93 41.5,130.75 v1(45.25,130.75)
COL_5: IC1.5 SW5.2 SW10.2 SW15.2 SW20.2 SW25.2 | length 204.4
  Top Layer w0.254: v1(45.25,131.75) 51.25,131.75 54,129 54,94 57.85,90.15 83.35,90.15 87.5,86 87.5,77.1 SW25.2 87.5,71.1 87.5,60.1 SW20.2 84.5,57 87.5,54 87.5,43.1 SW15.2 84.5,40 87.5,37 87.5,26.1 SW10.2 87.5,20.1 87.5,9.1 87.3,8.9 ; SW5.2 87.3,8.9 ; 87.3,2.1 87.3,8.9
  Bottom Layer w0.254: IC1.5 21.823,133.877 39.873,133.877 42,131.75 v1(45.25,131.75)
EN1: C10.1 IC1.3 R15.1 R16.1 SW27.A1 | length 54.4
  Top Layer w0.3: v1(24.975,103.325) 24.975,105.6 28.5,109.125 v1(28.5,135.6)
  Bottom Layer w0.3: R16.1 24.526,135.149 23.126,135.149 22.921,135.354 22.921,135.724 23.097,135.9 23.2,135.9 ; C10.1 21.56,136.8 IC1.3 21.8,136.44 22.66,136.44 23.2,135.9 ; v1(28.5,135.6) 27.73,135.6 27.43,135.9 23.2,135.9
  Bottom Layer w0.5: SW27.A1 24.15,100.075 ; v1(24.975,103.325) 24.975,100.9 24.15,100.075 ; R15.1 25.15,99.075 24.15,100.075
GND: C1.2 C2.1 C3.1 C4.1 C5.2 C6.1 C7.2 C8.2 C9.2 C10.2 D26.C D27.2 IC1.1 IC1.40 IC2.1 IC2.3 IC2.6 IC2.9 IC3.4 J1.1 J2.1 J2.2 J2.19 J2.20 J2.MP1 J2.MP2 R7.1 R11.1 R12.1 R13.1 R18.1 R19.1 SW26.D1 SW27.D1 U1.2 USB1.1 USB1.12 USB1.13 USB1.14 X1.2 | length 53.5
  Bottom Layer w0.3: v1(59.2,116.1) 59.308,116.1 59.458,116.25 J2.20 ; v1(59.2,117) 59.275,117 59.525,116.75 J2.19 ; R7.1 71.112,123.062 72.012,123.062 v1(72.025,123.075) ; C1.2 72.458,120.117 72.458,121.057 v1(72.475,121.075)
  Bottom Layer w0.4: R19.1 v1(79.262,138.589)
  Bottom Layer w0.5: v1(1.675,139.375) 1.694,139.356 3.454,139.356 IC1.40 ; v1(14.8,96.3) 14.813,96.312 15.913,96.312 SW27.D1 ; IC1.1 22.05,139.28 22.826,140.056 22.931,140.056 v1(22.95,140.075) ; SW26.D1 v1(23.15,109.25) ; C9.2 25.551,137.852 26.434,137.852 v1(26.445,137.841) ; C10.2 25.591,136.799 26.502,136.799 v1(26.503,136.798) ; C8.2 26.356,139.206 27.494,139.206 v1(27.5,139.212) ; v1(29.575,106.25) 29.575,106.223 29.625,106.173 D26.C ; v1(47.2,136.7) 47.219,136.719 47.219,137.894 D27.2 ; R12.1 48.088,143.312 48.088,144.387 v1(48.1,144.4) ; v1(49.125,141.4) 49.144,141.381 50.281,141.381 50.558,141.104 50.558,140.879 50.558,140.696 50.281,140.419 49.169,140.419 v1(49.15,140.4) ; v1(49.15,144.625) 49.169,144.644 USB1.13@50.124,144.644 ; v1(49.15,145.65) 49.169,145.631 50.006,145.631 50.124,145.513 50.235,145.513 50.558,145.189 50.558,145.079 50.558,144.968 50.235,144.645 USB1.13@50.124,144.645 ; v1(51.6,139.1) 51.6,139.127 51.683,139.21 USB1.1 ; X1.2 v1(55.075,138.575) ; USB1.12@58.083,140.429 58.108,140.129 v1(58.125,139.4) ; USB1.14@59.208,140.879 59.208,140.721 59.485,140.444 60.881,140.444 v1(60.9,140.425) ; USB1.14@59.208,141.008 59.485,141.285 60.508,141.285 60.798,141.575 v1(60.825,141.575) ; USB1.14@59.208,145.079 59.208,144.968 59.532,144.645 59.642,144.645 59.768,144.519 60.656,144.519 v1(60.675,144.5) ; USB1.14@59.208,145.189 59.532,145.513 59.642,145.513 59.686,145.556 60.656,145.556 v1(60.675,145.575) ; v1(59.841,133.052) 59.855,133.067 60.958,133.067 R18.1 ; R11.1 62.873,143.3 62.923,143.35 v1(62.95,143.35) ; v1(62.05,133.925) 62.069,133.944 62.55,133.944 63.026,134.42 IC2.1 ; v1(62.05,136.95) 62.055,136.955 63.433,136.955 IC2.3 ; C6.1 v1(65.8,139.9) ; IC2.6 70.233,136.96 70.273,137 v1(70.3,137) ; v1(71.336,137.982) 71.345,137.991 72.541,137.991 C7.2 ; v1(71.975,130.95) 71.993,130.967 72.833,130.967 C4.1 ; C5.2 74.35,127.69 74.35,126.902 74.475,126.777 v1(74.475,126.75) ; v1(74.575,130.1) 74.575,130.073 75.085,129.562 75.085,129.023 U1.2 ; v1(75.2,127.5) 75.2,127.527 75.135,127.592 U1.2 ; v1(75.675,130.1) 75.675,130.073 75.185,129.583 75.185,129.023 U1.2 ; v1(77.925,144.025) J1.1 ; v1(78,128.9) R13.1
  other v1: 62.4,114.6 63.3,114.6 66.525,119.175 67.45,119.2 59.1,125.45 59.075,126.125 62.3,127.4 63.2,127.4 65.5,135 67,135 66.25,135.5 65.5,136.25 67,136.25 66.25,136.75 65.5,137.5 67,137.5
LED: D28.C R17.2 | length 1.6
  Bottom Layer w0.5: D28.C 43.55,105.275 R17.2@43.55,105.325
NetD1_2: D1.2 SW1.1 | length 10.3
  Bottom Layer w0.254: SW1.1 9.318,10.018 9.318,14.794 11.291,16.766 D1.2
NetD2_2: D2.2 SW2.1 | length 10.3
  Bottom Layer w0.254: SW2.1 27.064,9.764 27.064,14.54 29.291,16.766 D2.2
NetD3_2: D3.2 SW3.1 | length 10.3
  Bottom Layer w0.254: SW3.1 45.064,9.764 45.064,14.54 47.291,16.766 D3.2
NetD4_2: D4.2 SW4.1 | length 10.3
  Bottom Layer w0.254: SW4.1 62.941,9.641 62.941,14.54 63.064,14.54 65.291,16.766 D4.2
NetD5_2: D5.2 SW5.1 | length 10.2
  Bottom Layer w0.254: SW5.1 81.334,10.034 81.334,14.032 83.416,16.114 D5.2
NetD6_2: D6.2 SW6.1 | length 10.3
  Bottom Layer w0.254: SW6.1 9.59,27.29 9.59,32.066 11.291,33.766 D6.2
NetD7_2: D7.2 SW7.1 | length 10.3
  Bottom Layer w0.254: SW7.1 27.59,27.29 27.59,32.066 29.291,33.766 D7.2
NetD8_2: D8.2 SW8.1 | length 10.3
  Bottom Layer w0.254: SW8.1 45.59,27.29 45.59,32.066 47.291,33.766 D8.2
NetD9_2: D9.2 SW9.1 | length 10.3
  Bottom Layer w0.254: SW9.1 63.59,27.29 63.59,32.066 65.291,33.766 D9.2
NetD10_2: D10.2 SW10.1 | length 10.3
  Bottom Layer w0.254: SW10.1 81.59,27.29 81.59,32.066 83.291,33.766 D10.2
NetD11_2: D11.2 SW11.1 | length 10.3
  Bottom Layer w0.254: SW11.1 9.59,44.29 9.59,49.066 11.291,50.766 D11.2
NetD12_2: D12.2 SW12.1 | length 10.3
  Bottom Layer w0.254: SW12.1 27.59,44.29 27.59,49.066 29.291,50.766 D12.2
NetD13_2: D13.2 SW13.1 | length 10.3
  Bottom Layer w0.254: SW13.1 45.59,44.29 45.59,49.066 47.291,50.766 D13.2
NetD14_2: D14.2 SW14.1 | length 10.3
  Bottom Layer w0.254: SW14.1 63.59,44.29 63.59,49.066 65.291,50.766 D14.2
NetD15_2: D15.2 SW15.1 | length 10.3
  Bottom Layer w0.254: SW15.1 81.59,44.29 81.59,49.066 83.291,50.766 D15.2
NetD16_2: D16.2 SW16.1 | length 10.3
  Bottom Layer w0.254: SW16.1 9.59,61.29 9.59,66.066 11.291,67.766 D16.2
NetD17_2: D17.2 SW17.1 | length 10.3
  Bottom Layer w0.254: SW17.1 27.59,61.29 27.59,66.066 29.291,67.766 D17.2
NetD18_2: D18.2 SW18.1 | length 10.3
  Bottom Layer w0.254: SW18.1 45.59,61.29 45.59,66.066 47.291,67.766 D18.2
NetD19_2: D19.2 SW19.1 | length 10.3
  Bottom Layer w0.254: SW19.1 63.59,61.29 63.59,66.066 65.291,67.766 D19.2
NetD20_2: D20.2 SW20.1 | length 10.3
  Bottom Layer w0.254: SW20.1 81.59,61.29 81.59,66.066 83.291,67.766 D20.2
NetD21_2: D21.2 SW21.1 | length 10.3
  Bottom Layer w0.254: SW21.1 9.59,78.29 9.59,83.066 10.262,83.738 11.291,84.766 D21.2
NetD22_2: D22.2 SW22.1 | length 10.3
  Bottom Layer w0.254: SW22.1 27.59,78.29 27.59,83.066 28.262,83.738 29.291,84.766 D22.2
NetD23_2: D23.2 SW23.1 | length 10.3
  Bottom Layer w0.254: SW23.1 45.59,78.29 45.59,83.066 46.262,83.738 47.291,84.766 D23.2
NetD24_2: D24.2 SW24.1 | length 10.3
  Bottom Layer w0.254: SW24.1 63.59,78.29 63.59,83.066 64.262,83.738 65.291,84.766 D24.2
NetD25_2: D25.2 SW25.1 | length 10.3
  Bottom Layer w0.254: SW25.1 81.59,78.29 81.59,83.066 82.262,83.738 83.291,84.766 D25.2
NetD26_A: D26.A R9.1 | length 1.4
  Bottom Layer w0.5: D26.A 31.19,105.215 32.456,105.215 32.481,105.24 R9.1
NetIC1_27: IC1.27 R14.1 SW26.A1 | length 31.8
  Top Layer w0.3: v1(2.384,118.821) 3.85,117.355 3.85,109.4 7.7,105.55 v1(13.1,105.55)
  Bottom Layer w0.3: 2.375,117.75 2.375,122.175 2.975,122.775 IC1.27 ; v1(2.384,118.821) 2.384,116.691 R14.1 ; v1(13.1,105.55) 13.125,105.525 15.9,105.525 SW26.A1
NetIC2_7: IC2.7 R17.1 | length 55.8
  Top Layer w0.254: v1(56,105.25) 56,128.525 58.225,130.75 v1@66.317,130.75
  Bottom Layer w0.5: R17.1 v1@56,105.3 ; v1(66.25,130.75) 68.75,130.75 70.725,132.725 70.725,135.125 70.16,135.69 IC2.7
NetIC3_1: IC3.1 R6.1 R7.2
NetIC3_5: IC3.5 L2.2 | length 3
  Bottom Layer w0.15: IC3.5 69.5,120.6
  Bottom Layer w0.2: L2.2 68.9,118.65 69.8,119.55 69.8,120.3 69.5,120.6
NetR8_1: R8.1 U1.1 | length 5.6
  Top Layer w0.254: v1(77.125,128.2) 77.125,126.675 v1(77.7,126.1)
  Bottom Layer w0.254: U1.1 76.125,128.933 76.125,128.374 76.299,128.2 v1(77.125,128.2) ; R8.1 77.663,124.637 77.663,126.062 v1(77.7,126.1)
NetR10_1: R10.1 R13.2 U1.5 | length 3.5
  Bottom Layer w0.5: U1.5 76.111,131.599 77.974,131.599 R13.2 R10.1
PROG: IC2.2 R18.2 | length 3
  Bottom Layer w0.5: R18.2 61.047,134.731 61.172,134.856 61.172,135.172 61.59,135.59 63.338,135.59 IC2.2
ROW_1: D1.1 D2.1 D3.1 D4.1 D5.1 IC1.25 R1.1 | length 194.5
  Bottom Layer w0.254: R1.1 5.075,116.575 5,116.5 ; IC1.25 6.81,119.56 5,117.75 5,116.5 ; D5.1 85.636,16.766 84.152,18.25 69.37,18.25 67.886,16.766 D4.1 67.636,16.766 66.152,18.25 51.37,18.25 49.886,16.766 D3.1 49.636,16.766 48.152,18.25 33.37,18.25 31.886,16.766 D2.1 31.636,16.766 30.152,18.25 15.37,18.25 13.886,16.766 D1.1 13.636,16.766 11.152,19.25 4.5,19.25 0.5,23.25 0.5,108.75 5,113.25 5,116.5
ROW_2: D6.1 D7.1 D8.1 D9.1 D10.1 IC1.24 R2.1 | length 181.3
  Bottom Layer w0.254: 2.7,32.9 2.7,36.481 2.691,36.491 ; IC1.24 8.08,118.83 7.25,118 7.25,116.5 ; R2.1 7.325,116.575 7.25,116.5 ; D10.1 85.636,33.766 84.38,35.022 69.142,35.022 67.886,33.766 D9.1 67.636,33.766 66.288,35.114 51.234,35.114 49.886,33.766 D8.1 49.636,33.766 48.288,35.114 33.234,35.114 31.886,33.766 D7.1 31.636,33.766 30.288,35.114 15.234,35.114 13.886,33.766 13.636,33.766 12.263,35.139 4.042,35.139 2.691,36.491 ; 2.691,36.491 1.381,37.8 1.381,107.131 7.25,113 7.25,116.5
ROW_3: D11.1 D12.1 D13.1 D14.1 D15.1 IC1.23 R3.1 | length 164.4
  Bottom Layer w0.254: 3.3,49.1 3.267,49.133 3.267,52.983 ; IC1.23 9.35,116.5 ; R3.1 9.425,116.575 9.35,116.5 ; D15.1 85.636,50.766 84.27,52.132 69.252,52.132 67.886,50.766 D14.1 67.636,50.766 66.27,52.132 51.252,52.132 49.886,50.766 D13.1 49.636,50.766 48.27,52.132 33.252,52.132 31.886,50.766 D12.1 31.636,50.766 30.27,52.132 15.252,52.132 13.886,50.766 D11.1 13.636,50.766 12.27,52.132 4.118,52.132 3.267,52.983 ; 3.267,52.983 2.25,54 2.25,106 9.35,113.1 9.35,116.5
ROW_4: D16.1 D17.1 D18.1 D19.1 D20.1 IC1.22 R4.1 | length 146.8
  Bottom Layer w0.254: 4.1,66.6 4.1,69.422 4.061,69.461 ; IC1.22 10.62,118.13 11.5,117.25 11.5,116.5 ; R4.1 11.575,116.575 11.5,116.5 ; D20.1 85.636,67.766 84.252,69.15 69.27,69.15 67.886,67.766 D19.1 67.636,67.766 66.252,69.15 51.27,69.15 49.886,67.766 D18.1 49.636,67.766 48.252,69.15 33.27,69.15 31.886,67.766 D17.1 31.636,67.766 30.252,69.15 15.27,69.15 13.886,67.766 D16.1 13.636,67.766 12.252,69.15 4.372,69.15 4.061,69.461 ; 4.061,69.461 3.229,70.293 3.25,70.314 3.25,105 11.5,113.25 11.5,116.5
ROW_5: D21.1 D22.1 D23.1 D24.1 D25.1 IC1.21 R5.1 | length 116.8
  Bottom Layer w0.254: IC1.21 11.89,118.86 13.75,117 13.75,116.5 ; R5.1 13.825,116.575 13.75,116.5 ; D25.1 85.636,84.766 84.488,85.914 69.034,85.914 67.886,84.766 D24.1 67.636,84.766 66.488,85.914 51.034,85.914 49.886,84.766 D23.1 49.636,84.766 48.488,85.914 33.034,85.914 31.886,84.766 D22.1 31.636,84.766 30.488,85.914 15.034,85.914 13.886,84.766 13.636,84.766 10.601,87.801 10.62,87.82 10.62,110.12 13.75,113.25 13.75,116.5
RST: IC1.18 J2.7 | length 48.2
  Bottom Layer w0.2: 58.5,121.576 59.649,122.725 60.15,122.725 J2.7
  Bottom Layer w0.3: 52.674,118.75 55.674,118.75 58.5,121.576
  Bottom Layer w0.4: IC1.18 15.7,119.55 16.5,118.75 52.674,118.75
RX: IC1.10 J2.6 | length 41.2
  Top Layer w0.4: v1(36.25,127.85) 41.4,127.85 46.75,122.5 v1(48,122.5)
  Bottom Layer w0.2: v1(48,122.5) 58.631,122.5 59.381,123.25 J2.6
  Bottom Layer w0.5: IC1.10 v1(36.25,127.85)
SW: L1.1 U1.3 | length 2.2
  Bottom Layer w0.5: L1.1@72.2,129.39 72.21,129.4 73,129.4 73.427,128.973 U1.3
TX: IC1.9 J2.5 | length 41.1
  Top Layer w0.4: v1(36.25,129.12) 41.63,129.12 47.25,123.5 v1(48,123.5)
  Bottom Layer w0.254: v1(48,123.5) 58.951,123.5 59.201,123.75 J2.5
  Bottom Layer w0.5: IC1.9 v1(36.25,129.12)
USB_IN_N: USB1.5 USB1.7 X1.1 | length 4.9
  Bottom Layer w0.281: USB1.5@54.124,140.419 54.133,140.429 54.143,140.419 54.143,139.639 54.425,139.357 54.65,139.357 ; X1.1 54.125,138.832 54.65,139.357 ; USB1.7@55.133,140.429 55.133,139.615 54.875,139.357 54.65,139.357
USB_IN_P: USB1.6 USB1.8 X1.3 | length 5.9
  Bottom Layer w0.281: USB1.6@54.633,140.429 54.643,140.438 54.643,141.218 54.925,141.5 55.375,141.5 55.633,141.242 55.633,140.429 55.633,139.049 56.025,138.658 X1.3
USB_N: IC1.13 X1.6 | length 39.4
  Bottom Layer w0.281: IC1.13 22.05,124.04 22.443,123.647 33.645,123.647 34.504,124.506 45.506,124.506 54.833,133.833 54.833,134.066 54.668,134.23 54.612,134.23 54.284,134.558 54.284,135.066 X1.6
USB_P: IC1.14 X1.4 | length 40.2
  Bottom Layer w0.281: IC1.14 22.05,122.77 22.443,123.163 33.846,123.163 34.704,124.022 45.706,124.022 55.317,133.632 55.317,134.066 55.482,134.23 55.538,134.23 55.866,134.558 55.866,135.066 X1.4
VIN: C1.1 C4.2 D29.1 IC3.2 IC3.3 L2.1 Q2.2 R8.2 U1.4 | length 25.4
  Bottom Layer w0.254: 67.7,127.2 69.638,127.2 69.7,127.137 ; 72.725,132.725 72.725,132.775
  Bottom Layer w0.5: 72.725,132.725 69.7,129.7 69.7,127.137 69.7,125.675 70.775,124.6 74.125,124.6 ; 74.15,124.575 74.125,124.6 ; R8.2@75.741,124.6 74.125,124.6
  Bottom Layer w1: L2.1 73.65,118.6 74.45,119.4 74.45,124.225
pads on no net: IC1.4 IC1.12 IC1.15 IC1.16 IC1.17 IC1.19 IC1.20 IC1.26 IC1.28 IC1.29 IC1.30 IC1.31 IC1.32 IC1.33 IC1.34 IC1.35 IC1.36 IC1.37 IC1.38 IC1.39 J2.8 J2.9 J2.10 J2.11 J2.12 J2.13 J2.14 J2.15 J2.16 J2.17 J2.18 MH1.MH MH2.MH MH3.MH MH4.MH MH5.MH SW1.Un1 SW1.Un2 SW1.Un3 SW2.Un1 SW2.Un2 SW2.Un3 SW3.Un1 SW3.Un2 SW3.Un3 SW4.Un1 SW4.Un2 SW4.Un3 SW5.Un1 SW5.Un2 SW5.Un3 SW6.Un1 SW6.Un2 SW6.Un3 SW7.Un1 SW7.Un2 SW7.Un3 SW8.Un1 SW8.Un2 SW8.Un3 SW9.Un1 SW9.Un2 SW9.Un3 SW10.Un1 SW10.Un2 SW10.Un3 SW11.Un1 SW11.Un2 SW11.Un3 SW12.Un1 SW12.Un2 SW12.Un3 SW13.Un1 SW13.Un2 SW13.Un3 SW14.Un1 SW14.Un2 SW14.Un3 SW15.Un1 SW15.Un2 SW15.Un3 SW16.Un1 SW16.Un2 SW16.Un3 SW17.Un1 SW17.Un2 SW17.Un3 SW18.Un1 SW18.Un2 SW18.Un3 SW19.Un1 SW19.Un2 SW19.Un3 SW20.Un1 SW20.Un2 SW20.Un3 SW21.Un1 SW21.Un2 SW21.Un3 SW22.Un1 SW22.Un2 SW22.Un3 SW23.Un1 SW23.Un2 SW23.Un3 SW24.Un1 SW24.Un2 SW24.Un3 SW25.Un1 SW25.Un2 SW25.Un3 SW26.B1 SW26.C1 SW27.B1 SW27.C1 USB1.3 USB1.9
copper on no net: | length 3
  Bottom Layer w0.4: 42.9,135.1 v1(42.9,136.6)
  Bottom Layer w0.5: v1(46.1,136.6) 46.119,136.581 46.119,135.181 46.2,135.1
  other v1: 17.3,7.2 63.2,17.2 79.4,17.2 28.7,19.2 49.9,19.6 90,24.1 27.7,52.9 47.7,52.9 15.425,130.14
  other v2: 12.625,130.14 14.025,130.14 12.625,131.54 14.025,131.54 15.425,131.54 12.625,132.94 14.025,132.94 15.425,132.94

## Polygon pours and split planes (outlines as drawn)
GND on Bottom Layer "NONET_L01_P-001" (solid, pour order 32): 61.7,127.7 62,128 63.5,128 63.8,127.7 63.8,126.4 63.5,126.1 62,126.1 61.7,126.4
GND on Bottom Layer "NONET_L01_P-001" (solid, pour order 33): 61.9,115.6 62.2,115.9 63.6,115.9 63.9,115.6 63.9,114.3 63.6,114 62.1,114 61.9,114.2
GND on Bottom Layer "NONET_L01_P-001" (solid, pour order 41): 59.8,125.075 60.55,125.075 60.65,125.175 60.65,125.925 60.425,126.15 59.85,126.15 59.5,126.5 58.75,126.5 58.475,126.225 58.475,125.3 58.675,125.1
"5V LIPO" on Bottom Layer "NONET_L01_P-001" (solid, pour order 42): 57.975,124.025 57.975,124.95 60.6,124.95 60.65,124.9 60.65,124.1 60.575,124.025
VIN on Bottom Layer "NONET_L01_P-001" (solid, pour order 40): 70.275,120.575 70.25,120.55 70.25,117.975 70.575,117.65 71.7,117.65 71.7,117.675 72.025,118 72.025,120.525 71.725,120.825 70.4,120.825 70.275,120.7
GND on Bottom Layer "NONET_L01_P-001" (solid, pour order 39): 66.9,120.475 66.95,120.475 68.375,120.475 68.525,120.325 69.175,120.325 69.175,120.3 69.275,120.2 69.275,119.85 69.075,119.65 68.1,119.65 67.95,119.5 67.95,119 67.575,118.625 66.275,118.625 66.1,118.8 66.1,120.334 66.25,120.475
"5V LIPO" on Bottom Layer "NONET_L01_P-001" (solid, pour order 38): 66.3,121.1 66.3,120.8 66.5,120.6 68.325,120.6 68.65,120.925 69.25,120.925 69.4,121.075 69.4,122.525 69.575,122.7 70.4,122.7 70.525,122.825 70.525,123.375 70.4,123.5 68.575,123.5
NetIC3_1 on Bottom Layer "NONET_L01_P-001" (solid, pour order 37): 69.6,122.4 69.6,121.7 69.8,121.5 70.1,121.5 70.3,121.3 70.3,121 70.4,120.9 70.9,120.9 71.6,121.6 71.6,122.4 71.5,122.5 69.7,122.5
no net on Bottom Layer "NONET_L01_P-001" (solid, pour order 34): 70.9,120.5 70.9,120 71.3,119.6
+3V3 on Bottom Layer "+3V3_L04_P018" (solid, pour order 18): 20.3,137.575 20.55,137.325 22.3,137.325 22.375,137.25 23.275,137.25 23.4,137.375 24.275,137.375 25.1,137.375 25.1,138.025 25.2,138.6 25.55,138.95 25.5,139.8 23.557,139.8 23.113,139.587 23.113,138.9 22.975,138.9 22.8,138.725 22.25,138.725 22.075,138.55 20.475,138.55 20.3,138.375
+3V3 on Bottom Layer "+3V3_L04_P014" (solid, pour order 14): 70.5,128.55 70.275,128.325 70.275,126.775 71.075,125.975 73.4,125.975 73.95,126.525 73.925,126.55 73.925,128.05 73.575,128.4 71.35,128.4 71.2,128.55
5V on Bottom Layer "5V_L04_P001" (solid, pour order 1): 77.25,136.9 78.4,136.9 78.8,136.5 80.7,136.5 81.2,136 81.2,134 80.1,132.9 77.9,132.9 76.9,133.9 76.9,136.6 77.1,136.8
VIN on Bottom Layer "VIN_L04_P000" (solid, pour order 0): 72.5,133.5 75.1,136.1 75.2,136.8 76,136.9 76.4,136.5 76.4,135.1 76,134.7 76,133 74.8,131.8 74.8,130.975 74.09,130.955 72.5,131.561
+3V3 on Int1 (PWR) "NONET_L01_P-001" (solid, pour order 45): 95.5,0 ccw(c95.5,1.5) 97,1.5 97,103.5 ccw(c96,103.5) 96,104.5 92.5,104.5 cw(c92.5,106) 91,106 91,144.5 ccw(c89,144.5) 89,146.5 39.5,146.5 ccw(c39.5,145) 38,145 38,141.5 cw(c37,141.5) 37,140.5 1.5,140.5 ccw(c1.5,139) 0,139 0,2 ccw(c2,2) 2,0
GND on Int2 (GND) "NONET_L01_P-001" (solid, pour order 46): 95.5,0 ccw(c95.5,1.5) 97,1.5 97,103.5 ccw(c96,103.5) 96,104.5 92.5,104.5 cw(c92.5,106) 91,106 91,144.5 ccw(c89,144.5) 89,146.5 39.5,146.5 ccw(c39.5,145) 38,145 38,141.5 cw(c37,141.5) 37,140.5 1.5,140.5 ccw(c1.5,139) 0,139 0,2 ccw(c2,2) 2,0

## Other copper
Top Layer:
  region: 10.582,90.384 10.582,90.372 10.557,90.372 10.557,90.41 10.594,90.41 10.594,90.384
  region: 12.591,90.611 12.591,90.598 12.566,90.598 12.566,90.585 12.554,90.585 12.554,90.598 12.541,90.598 12.541,90.623 12.591,90.623
  region: 14.513,90.573 14.488,90.573 14.488,90.585 14.525,90.585 14.525,90.573
  region: 13.747,90.221 13.797,90.221 13.797,90.209 13.772,90.209 13.772,90.196 13.759,90.196 13.759,90.209 13.747,90.209
  region: 14.865,90.46 14.865,90.447 14.852,90.447 14.852,90.46
  region: 10.845,89.945 10.82,89.945 10.82,89.97 10.845,89.97 10.845,89.957
  region: 10.645,90.41 10.645,90.397 10.632,90.397 10.632,90.41
  region: 11.348,89.907 11.348,89.895 11.335,89.895 11.335,89.907
  region: 12.591,90.585 12.591,90.598 12.616,90.598 12.616,90.585 12.604,90.585
  region: 13.822,90.209 13.822,90.196 13.81,90.196 13.81,90.209
  region: 10.745,90.334 10.72,90.334 10.72,90.359 10.745,90.359 10.745,90.347
  region: 10.544,90.41 10.531,90.41 10.531,90.397 10.519,90.397 10.519,90.422 10.544,90.422
  region: 10.104,90.322 10.104,90.347 10.13,90.347 10.13,90.322 10.117,90.322
  region: 13.998,90.259 13.973,90.259 13.973,90.271 13.998,90.271
  region: 10.205,89.995 10.205,89.983 10.192,89.983 10.192,89.995
  region: 12.175,133.39 15.875,133.39 15.875,129.69 12.175,129.69

## Silkscreen, mask and mechanical layers (free items; w line width, h text height)
Top Overlay:
  drawing of 143 lines, arcs and shapes, not listed
  text "David Shimizu" at 66.124,91.021 h4
Bottom Overlay:
  text "BAT-" at 76.37,143.292 h3.5
  text "BAT+" at 76.354,140.868 h3.5
  text "3V3" at 43.974,133.196 h1.52
  text "GND" at 47.578,133.196 h1.52
  text "5V" at 50.937,133.196 h1.52
  text "VIN" at 69,125.096 h1.52
  text "BOOT" at 23.5,101.955 h3.5
  text "POWER" at 35.639,101.939 h3.5
  text "CHARGE" at 46.614,101.939 h3.5
  text "RESET" at 22.725,91.814 h3.5